# EAGLE board star-tracker-camera-breakout (EAGLE 9.6.2)
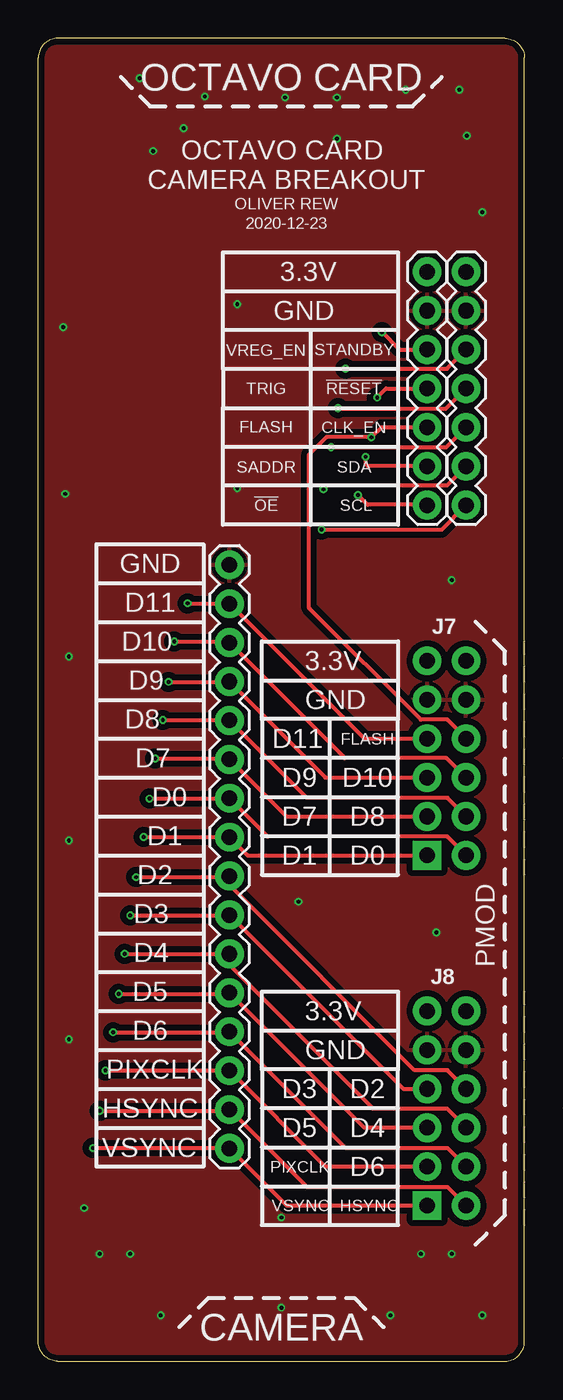
[diagram p0: board, top side]
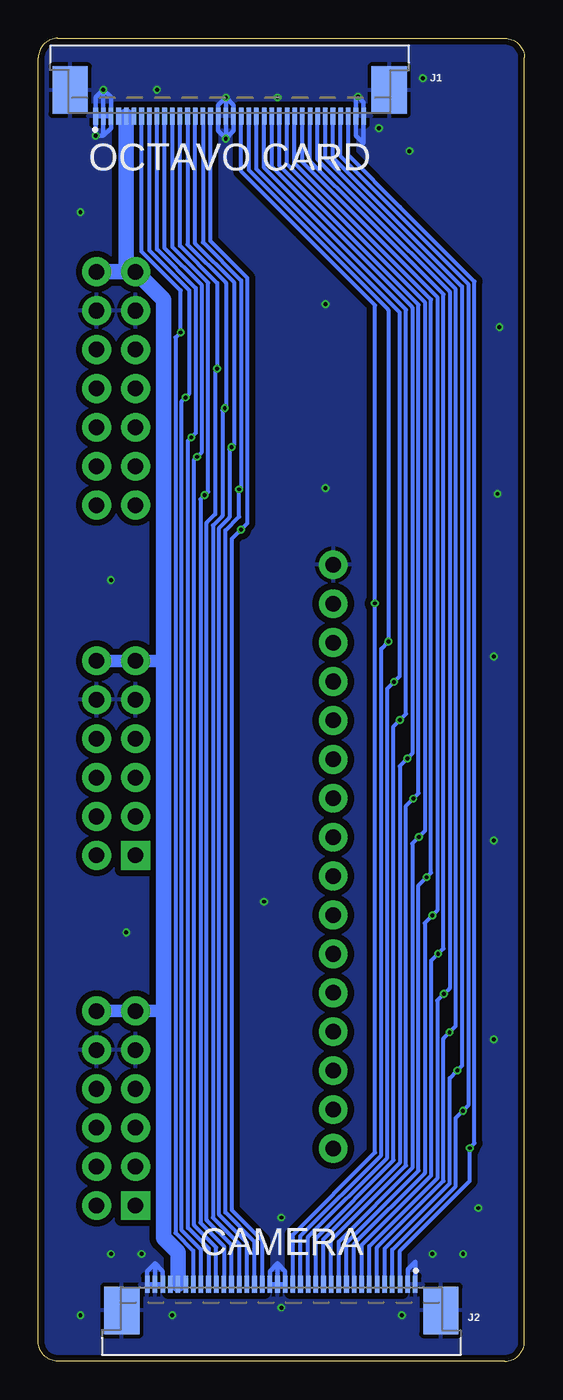
[diagram p1: board, bottom side, seen from below]

Size 31.75 x 86.36 mm. Coordinates in mm from the lower left corner, seen from the top.
Outline: 1.27,0 30.48,0 arc90 31.75,1.27 31.75,85.09 arc90 30.48,86.36 1.27,86.36 arc90 0,85.09 0,1.27 arc90 1.27,0
Copper layers (1*16): Top 0.035559375mm / dielectric 1.6mm / Bottom 0.035559375mm
Design rules "oshpark-2layer *": minimum track width 6mil, minimum drill 10mil, track to track 6mil, track to pad 6mil, pad to pad 6mil, via to via 6mil, smd to smd 6mil, copper to edge 15mil, drill to drill 6mil, minimum pad ring 5mil, minimum via ring 5mil, stop-mask expansion 2.5mil, vias tented up to drill 50mil, thermal gap 10mil

## Footprints (pad centres in the part's own frame; a part is rotated, then mirrored left to right if it is on the bottom)
TE_3-1734592-6 = smd 0.3 x 1.1: 1 -8.75,0; 2 -8.25,0; 3 -7.75,0; 4 -7.25,0; 5 -6.75,0; 6 -6.25,0; 7 -5.75,0; 8 -5.25,0; 9 -4.75,0; 10 -4.25,0; 11 -3.75,0; 12 -3.25,0; 13 -2.75,0; 14 -2.25,0; 15 -1.75,0; 16 -1.25,0; 17 -0.75,0; 18 -0.25,0; 19 0.25,0; 20 0.75,0; 21 1.25,0; 22 1.75,0; 23 2.25,0; 24 2.75,0; 25 3.25,0; 26 3.75,0; 27 4.25,0; 28 4.75,0; 29 5.25,0; 30 5.75,0; 31 6.25,0; 32 6.75,0; 33 7.25,0; 34 7.75,0; 35 8.25,0; 36 8.75,0 | smd 2.3 x 3.1: S1 10.42,1.7; S2 -10.42,1.7
1X16 = drill 1.016 pad 1.88: 1 0,0; 2 2.54,0; 3 5.08,0; 4 7.62,0; 5 10.16,0; 6 12.7,0; 7 15.24,0; 8 17.78,0; 9 20.32,0; 10 22.86,0; 11 25.4,0; 12 27.94,0; 13 30.48,0; 14 33.02,0; 15 35.56,0; 16 38.1,0
1X07 = drill 1.016 pad 1.88: 1 0,0; 2 2.54,0; 3 5.08,0; 4 7.62,0; 5 10.16,0; 6 12.7,0; 7 15.24,0
PMOD_PERIPH = drill 1.016 pad 1.88 square: 1 0,0 | drill 1.016 pad 1.88: 2 0,-2.54; 3 0,-5.08; 4 0,-7.62; 5 0,-10.16; 6 0,-12.7; 7 -2.54,0; 8 -2.54,-2.54; 9 -2.54,-5.08; 10 -2.54,-7.62; 11 -2.54,-10.16; 12 -2.54,-12.7

## Placement (x,y rotation side)
J1  3-1734592-64-1734592-0  [TE_3-1734592-6]  19.25,81.28 0 bottom
J2  3-1734592-64-1734592-0  [TE_3-1734592-6]  15.88,5.02 180 bottom
J3  [1X16]  12.48,13.89 90 top
J4  [1X07]  27.94,71.12 270 top
J5  [1X07]  25.4,71.12 270 top
J7  2X6 FEMALE  [PMOD_PERIPH]  25.4,33.02 180 top
J8  2X6 FEMALE  [PMOD_PERIPH]  25.4,10.16 180 top

## Library data of the parts
J1 J2 = J-TEConnectivity-X-1734592-X; DPN: A100291CT-ND; MPN: 3-1734592-6
J3-J5 = SparkFun-Connectors
J7 J8 = PMOD; PROD_ID: CONN-12423

## Nets
3.3V: J1.4 J1.5 J1.6 J2.31 J2.32 J2.33 J4.1 J5.1 J7.6 J7.12 J8.6 J8.12
!OE_E: J1.11 J2.26 J5.7
!RESET_E: J1.13 J2.24 J4.4
CLK_EN_E: J1.14 J2.23 J4.5
D0_E: J1.25 J2.12 J3.10 J7.7
D1_E: J1.26 J2.11 J3.9 J7.1
D2_E: J1.27 J2.10 J3.8 J8.10
D3_E: J1.28 J2.9 J3.7 J8.4
D4_E: J1.29 J2.8 J3.6 J8.9
D5_E: J1.30 J2.7 J3.5 J8.3
D6_E: J1.31 J2.6 J3.4 J8.8
D7_E: J1.24 J2.13 J3.11 J7.2
D8_E: J1.23 J2.14 J3.12 J7.8
D9_E: J1.22 J2.15 J3.13 J7.3
D10_E: J1.21 J2.16 J3.14 J7.9
D11_E: J1.20 J2.17 J3.15 J7.4
FLASH_E: J1.9 J2.28 J5.5 J7.10
GND: J1.1 J1.2 J1.3 J1.17 J1.18 J1.19 J1.35 J1.36 J1.S1 J1.S2 J2.1 J2.2 J2.18 J2.19 J2.20 J2.34 J2.35 J2.36 J2.S1 J2.S2 J3.16 J4.2 J5.2 J7.5 J7.11 J8.5 J8.11
HSYNC_E: J1.33 J2.4 J3.2 J8.7
I2C2_SCL: J1.16 J2.21 J4.7
I2C2_SDA: J1.15 J2.22 J4.6
PIXCLK_E: J1.32 J2.5 J3.3 J8.2
SADDR_E: J1.10 J2.27 J5.6
STANDBY_E: J1.12 J2.25 J4.3
TRIGGER_E: J1.8 J2.29 J5.4
VREG_EN_E: J1.7 J2.30 J5.3
VSYNC_E: J1.34 J2.3 J3.1 J8.1

## Tracks (layer width: path | path; a pad name or v marks a point on that pad's centre or on a via)
3.3V
  Bottom 0.305: J2.31 J2.32 J2.33 | J1.6 J1.5 J1.4
  Bottom 0.813: J7.12 J7.6 23.57,45.72 | J8.12 J8.6 23.57,22.86
  Bottom 1.016: J2.32 22.62,7.09 23.57,8.04 23.57,22.86 23.57,45.72 23.57,69.29 J5.1 | J4.1 J5.1 | J5.1 26,71.72 J1.5
!OE_E  (via drill 0.25)
  Top 0.254: v20.88,56.54 21.51,55.91 25.37,55.91 J5.7
  Bottom 0.254: J2.26 19.62,7.51 21.16,9.04 21.16,56.27 v20.88,56.54 20.66,56.77 20.66,70.4 23,72.74 J1.11
!RESET_E  (via drill 0.25)
  Top 0.254: v19.57,62.23 19.62,62.18 26.62,62.18 J4.4
  Bottom 0.254: J2.24 18.62,7.66 20.34,9.38 20.34,54.57 19.73,55.18 19.73,62.07 v19.57,62.23 19.5,62.3 19.5,70.39 22,72.89 J1.13
CLK_EN_E  (via drill 0.25)
  Top 0.254: v19.13,59.66 26.64,59.66 J4.5
  Bottom 0.254: J2.23 18.12,7.73 19.94,9.54 19.94,54.4 19.26,55.08 19.26,59.54 v19.13,59.66 18.94,59.86 18.94,70.41 21.5,72.97 J1.14
D0_E  (via drill 0.25)
  Top 0.254: v7.26,36.73 7.29,36.75 J3.10 14.98,34.25 26.71,34.25 J7.7
  Bottom 0.254: J2.12 12.62,7.88 7.73,12.78 7.73,36.26 v7.26,36.73 6.92,37.07 6.92,68.97 16,78.05 16,79 J1.25
D1_E  (via drill 0.25)
  Top 0.254: v6.88,34.23 12.47,34.23 J3.9 13.68,33.02 J7.1
  Bottom 0.254: J2.11 12.12,7.81 7.32,12.61 7.32,33.79 v6.88,34.23 6.51,34.6 6.51,69.14 12.12,74.75 15.5,78.13 J1.26
D2_E  (via drill 0.25)
  Top 0.254: v6.38,31.6 12.41,31.6 J3.8 12.48,31.09 24.58,19 26.72,19 J8.10
  Bottom 0.254: J2.10 11.62,7.73 6.92,12.44 6.92,31.07 v6.38,31.6 6.1,31.88 6.1,69.31 15,78.2 J1.27
D3_E  (via drill 0.25)
  Top 0.254: v6.01,29.1 12.46,29.1 J3.7 23.84,17.78 J8.4
  Bottom 0.254: J2.9 11.12,7.66 6.51,12.27 6.51,28.6 v6.01,29.1 5.7,29.41 5.7,69.47 14.5,78.28 J1.28
D4_E  (via drill 0.25)
  Top 0.254: J8.9 26.68,16.5 21.85,16.5 12.48,25.86 J3.6 v5.63,26.6
  Bottom 0.254: J2.8 10.62,7.58 6.1,12.11 6.1,26.13 v5.63,26.6 5.29,26.95 5.29,69.64 10.62,74.98 14,78.35 J1.29
D5_E  (via drill 0.25)
  Top 0.254: J8.3 21.3,15.24 J3.5 12.41,23.98 v5.26,23.98
  Bottom 0.254: J2.7 10.12,7.51 5.7,11.94 5.7,23.54 v5.26,23.98 | v5.26,23.98 4.88,24.35 4.88,69.81 10.12,75.05 13.5,78.43 J1.30 | v5.26,23.98
D6_E  (via drill 0.25)
  Top 0.254: v4.88,21.48 12.45,21.48 J3.4 20.08,13.92 26.72,13.92 J8.8
  Bottom 0.254: J2.6 9.62,7.43 5.29,11.77 5.29,21.07 v4.88,21.48 4.48,21.88 4.48,69.98 13,78.5 J1.31
D7_E  (via drill 0.25)
  Top 0.254: v7.63,39.35 12.43,39.35 J3.11 16.21,35.56 J7.2
  Bottom 0.254: J2.13 13.12,7.96 8.13,12.95 8.13,38.85 v7.63,39.35 7.32,39.66 7.32,68.8 16.5,77.98 J1.24
D8_E  (via drill 0.25)
  Top 0.254: v8.13,41.85 12.46,41.85 J3.12 17.54,36.78 26.72,36.78 J7.8
  Bottom 0.254: J2.14 13.62,8.03 8.54,13.12 8.54,41.44 v8.13,41.85 7.73,42.26 7.73,68.63 13.62,74.53 17,77.9 J1.23
D9_E  (via drill 0.25)
  Top 0.254: v8.51,44.35 12.46,44.35 J3.13 18.75,38.1 J7.3
  Bottom 0.254: J2.15 14.12,8.11 8.95,13.28 8.95,43.91 v8.51,44.35 8.13,44.73 8.13,68.46 14.12,74.45 17.5,77.83 J1.22
D10_E  (via drill 0.25)
  Top 0.254: v8.88,46.98 12.42,46.98 J3.14 20.02,39.38 26.66,39.38 J7.9
  Bottom 0.254: J2.16 14.62,8.18 9.35,13.45 9.35,46.51 v8.88,46.98 8.88,68.64 18,77.75 J1.21
D11_E  (via drill 0.25)
  Top 0.254: v9.76,49.48 12.46,49.48 J3.15 21.3,40.64 J7.4
  Bottom 0.254: J2.17 15.12,8.26 9.76,13.62 v9.76,49.48 9.76,68.94 18.5,77.68 J1.20
FLASH_E  (via drill 0.25)
  Top 0.254: J7.10 26.7,41.88 24.98,41.88 17.69,49.17 17.69,59.19 18.81,60.31 v21.75,60.31 22.4,60.96 J5.5
  Bottom 0.254: J2.28 20.62,7.36 21.97,8.7 21.97,60.09 v21.75,60.31 21.47,60.59 21.47,70.06 24,72.59 J1.9
GND  (via drill 0.25)
  Bottom 0.305: J1.3 J1.2 | J1.1 J1.3 | J2.35 J2.36 24.62,5.88 24.12,6.38 | J2.35 J2.34 23.62,5.88 24.12,6.38 | 16.12,6.38 16.62,5.88 J2.20 J2.18 15.62,5.88 16.12,6.38 | J2.19 16.12,6.38 | J2.35 24.12,6.38 | J2.2 7.62,6 7.12,6.5 J2.1 | v19.5,82.5 19,82 J1.19 19,80.31 v19.5,79.81 | v19.5,82.5 20,82 J1.17 20,80.31 v19.5,79.81 | v19.5,82.5 J1.18 v19.5,79.81 | J1.3 27,80.5 27.5,80 | 27.5,80 v28,80 J1.1 | J1.2 27.5,80 | J1.1 28,82.5 v27.5,83 | J1.2 v27.5,83 | J1.3 27,82.5 v27.5,83 | J1.35 11,80 10.5,79.5 J1.36 10.5,82.19 v10.88,82.56 11,82.44 J1.35
  other vias: 24,83 16.12,82.5 9.5,80.5 7.5,79 6.62,83.75 13,69 13,57 1.62,67.5 1.75,56.62 2,46 2,34 2,21 3,10 6,7 4,7 8,3 23,3 25,7 29,3 27,7 26,28 27,51 29,75 17,30 15.88,9.38 15.88,3.5
  pour Bottom (isolate 0.4): -1.43,-0.92 32.57,-0.92 32.57,87.62 -1.43,87.62
  pour Top (isolate 0.4): -1.43,-0.92 32.57,-0.92 32.57,87.62 -1.43,87.62
HSYNC_E  (via drill 0.25)
  Top 0.254: v4.01,16.35 12.4,16.35 J3.2 17.54,11.38 26.72,11.38 J8.7
  Bottom 0.254: J2.4 8.62,7.28 4.48,11.43 4.48,15.88 v4.01,16.35 3.67,16.7 3.67,70.32 12,78.65 J1.33
I2C2_SCL  (via drill 0.25)
  Top 0.254: v18.51,54.29 26.35,54.29 J4.7
  Bottom 0.254: J2.21 17.12,7.88 19.12,9.88 19.12,53.67 v18.51,54.29 18.09,54.7 18.09,70.71 20.5,73.12 20.5,74.99 20.5,75 J1.16
I2C2_SDA  (via drill 0.25)
  Top 0.254: v18.63,56.91 18.88,57.16 26.68,57.16 J4.6
  Bottom 0.254: J2.22 17.62,7.81 19.53,9.71 19.53,54.23 18.63,55.13 v18.63,56.91 18.5,57.05 18.5,70.54 21,73.04 J1.15
PIXCLK_E  (via drill 0.25)
  Top 0.254: v4.38,18.98 J3.3 18.75,12.7 J8.2
  Bottom 0.254: J2.5 9.12,7.36 4.88,11.6 4.88,18.48 v4.38,18.98 4.07,19.29 4.07,70.15 12.5,78.58 J1.32
SADDR_E  (via drill 0.25)
  Top 0.254: v21.38,59.04 21.38,58.56 21.52,58.42 J5.6
  Bottom 0.254: J2.27 20.12,7.43 21.56,8.87 21.56,58.86 v21.38,59.04 21.06,59.36 21.06,70.23 23.5,72.67 J1.10
STANDBY_E  (via drill 0.25)
  Top 0.254: v20.07,64.79 26.69,64.79 J4.3
  Bottom 0.254: J2.25 19.12,7.58 20.75,9.21 20.75,54.73 20.2,55.29 20.2,64.67 v20.07,64.79 v20.06,64.8 20.06,70.38 22.5,72.82 J1.12
TRIGGER_E  (via drill 0.25)
  Top 0.254: v22.13,62.91 22.72,63.5 J5.4
  Bottom 0.254: J2.29 21.12,7.28 22.38,8.53 22.38,62.67 v22.13,62.91 21.88,63.17 21.88,69.89 24.5,72.52 J1.8
VREG_EN_E  (via drill 0.25)
  Top 0.254: v22.45,67.17 22.46,67.17 23.59,66.04 J5.3
  Bottom 0.254: J2.30 21.62,7.21 22.78,8.37 22.78,66.83 v22.45,67.17 22.45,69.89 25,72.44 J1.7
VSYNC_E  (via drill 0.25)
  Top 0.254: v3.57,13.91 12.46,13.91 J3.1 16.21,10.16 J8.1
  Bottom 0.254: J2.3 8.12,7.21 3.57,11.76 v3.57,13.91 3.26,14.23 3.26,70.48 8.12,75.35 11.5,78.73 J1.34

## Text on the board
tPlace: OCTAVO CARD / CAMERA BREAKOUT | OLIVER REW | 2020-12-23 | 3.3V | GND | VREG_EN | STANDBY | TRIG | !RESET | FLASH | CLK_EN | SADDR | SDA | !OE | SCL | GND | D11 | D10 | 3.3V | D9 | GND | D8 | D11 | FLASH | D7 | D9 | D10 | D0 | D7 | D8 | D1 | D1 | D0 | D2 | D3 | D4 | PMOD | D5 | 3.3V | D6 | GND | PIXCLK | D3 | D2 | HSYNC | D5 | D4 | VSYNC | PIXCLK | D6 | VSYNC | HSYNC
tNames: OCTAVO CARD | CAMERA
bNames: OCTAVO CARD | CAMERA